# Altium PCB OTA1.PcbDoc
Units mil, origin at the board's own origin, x right, y up, seen from the top; angles counter-clockwise.
Board outline 2250 x 975 mil, 2 copper layers (Top Layer, Bottom Layer); 21 components, 22 nets, 123 pads, 29 vias.
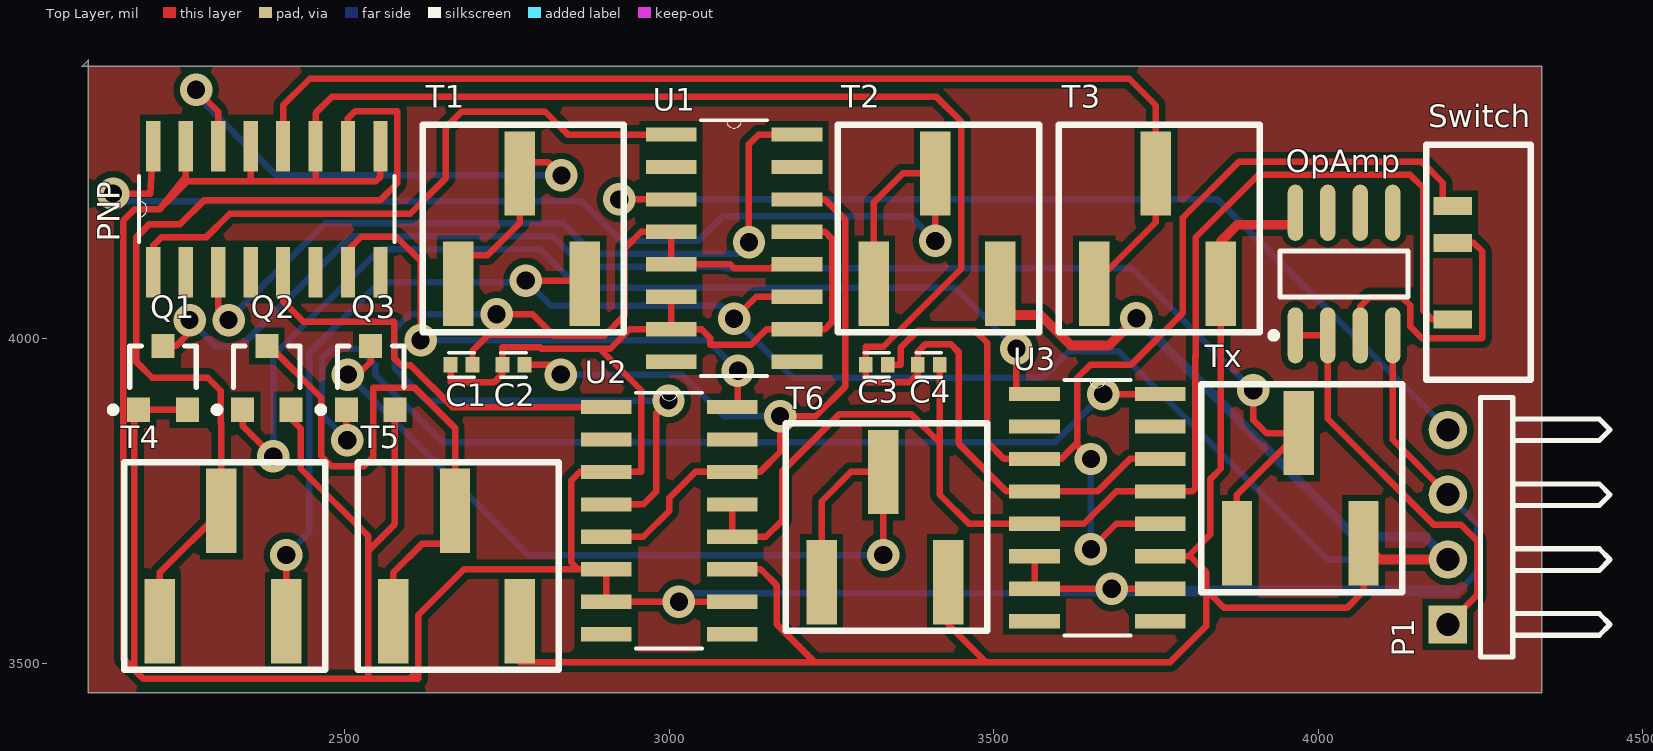
[diagram p0: Top Layer view]
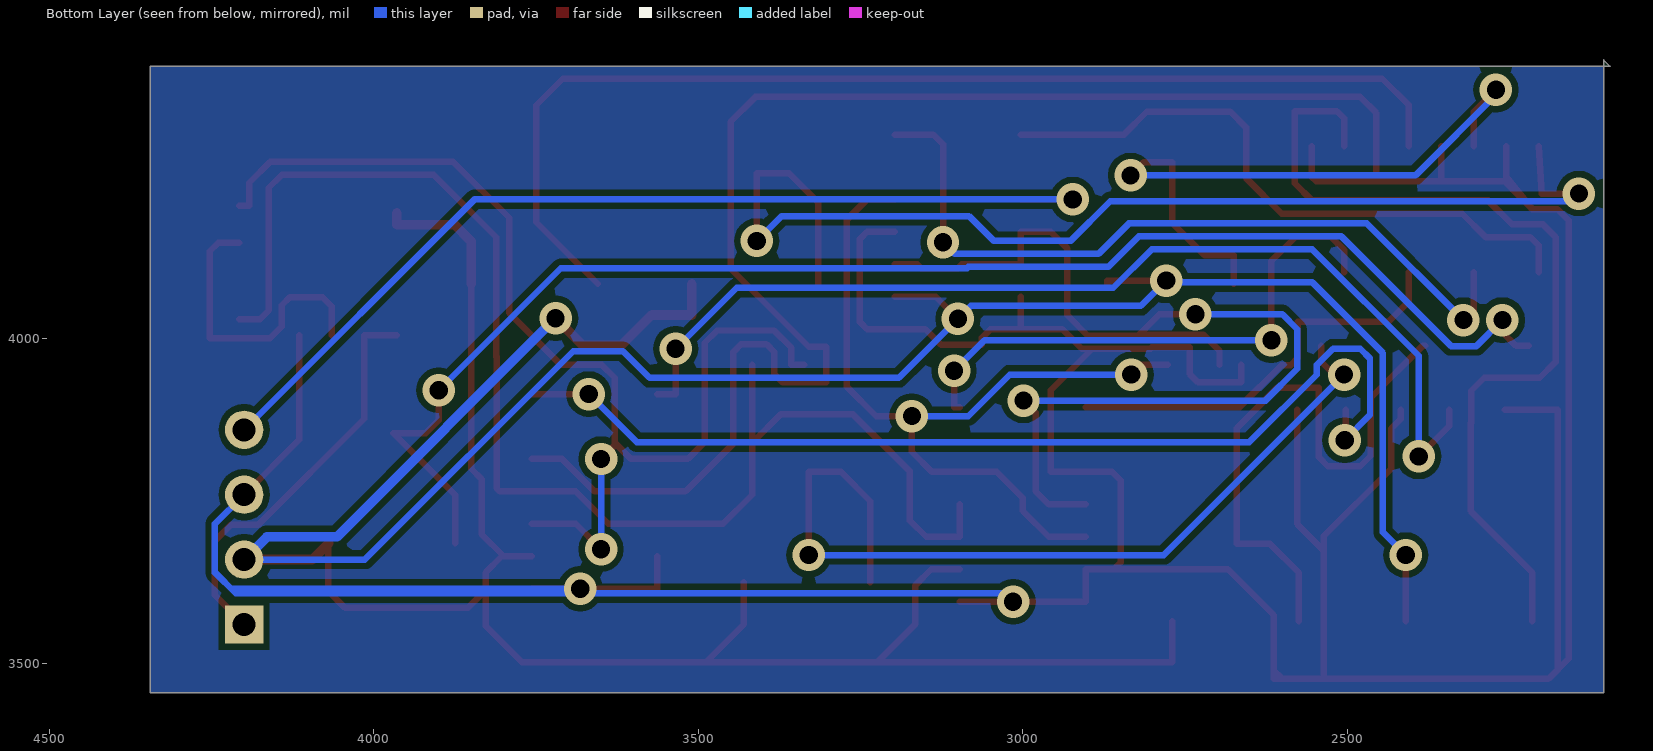
[diagram p1: Bottom Layer view, seen from below]

## Layer stack, top to bottom
Top Layer: signal copper 1.4
Dielectric: dielectric 12.6, FR-4, Dk 4.8
Bottom Layer: signal copper 1.4

## Board outline
2095,4420 4345,4420 4345,3455 2105,3455 2105,4430

## Design rules (kind name [scope] priority, off if disabled: settings)
Clearance [All] p1: gap=10
ComponentClearance [All] p1: gap=10 collisioncheckmode=3 verticalgap=10
PolygonConnect [All] p1: connectstyle=Relief reliefconductorwidth=10 reliefentries=4 polygonreliefangle="90 Angle"
RoutingVias [All] p1: holewidth=28 width=50 viastyle="Through Hole" minholewidth=28 minwidth=50 maxholewidth=28 maxwidth=50
SolderMaskExpansion [All] p1: expansion=4
TestPointUsage [All] p1: valid=0 allowmultiple=FALSE
Testpoint [All] p1: side=15 testpointundercomponent=TRUE minsize=40 maxsize=100 preferedsize=60 minholesize=0 maxholesize=40 preferedholesize=32 testpointgrid=1 style=1023 order=0-112345678
Width [All] p1: maxlimit=15 minlimit=10 preferedwidth=10 minimp=50.000000 maximp=50.000000 favimp=50.000000
18 further rules are at their usual default settings.

## Components (designator, comment, footprint, x,y, rotation, side; value= is the part's Value field where it differs from the comment)
C1 "10p" _C*CAPC1005X55N_CC0402C100K5GACAUTO_CPrimary_C 2680,3960 r0 top
C2 "10p" _C*CAPC1005X55N_CC0402C100K5GACAUTO_CPrimary_C 2760,3960 r0 top
C3 "10p" _C*CAPC1005X55N_CC0402C100K5GACAUTO_CPrimary_C 3320,3960 r0 top
C4 "10p" _C*CAPC1005X55N_CC0402C100K5GACAUTO_CPrimary_C 3400,3960 r0 top
OpAmp "LF153D" SO8_N 4040,4100 r90 top
P1 "Header 4H" HDR1X4H 4200,3560 r90 top
PNP "MMPQ3906" LM13700LM13700MLM13700LM13700MLM13700PrimaryLM13700 2380,4200 r90 top
Q1 "PNP" SOT-23B 2220,3940 r0 top
Q2 "PNP" SOT-23B 2380,3940 r0 top
Q3 "PNP" SOT-23B 2540,3940 r0 top
Switch "" PCBComponent_1#1 14380,19360 r90 top
T1 "1M" PCBComponent_1#2 17140,32160 r0 top
T2 "1M" PCBComponent_1#2 17780,32160 r0 top
T3 "1M" PCBComponent_1#2 18120,32160 r0 top
T4 "1M" PCBComponent_1#2 16680,31640 r0 top
T5 "1M" PCBComponent_1#2 17040,31640 r0 top
T6 "1M" PCBComponent_1#2 17700,31700 r0 top
Tx "1M" PCBComponent_1#2 18340,31760 r0 top
U1 "LM13700M" LM13700LM13700MLM13700LM13700MLM13700PrimaryLM13700 3100,4140 r0 top
U2 "LM13700M" LM13700LM13700MLM13700LM13700MLM13700PrimaryLM13700 3000,3720 r0 top
U3 "LM13700M" LM13700LM13700MLM13700LM13700MLM13700PrimaryLM13700 3660,3740 r0 top

## Footprints (in the part's own frame and the unit in brackets; to place one, negate y for a bottom-side part, rotate by r counter-clockwise, add the part's x,y. Pads: shape width x height; smd on the part's side, far side on the other; paste and mask are expansions set on the pad)
_C*CAPC1005X55N_CC0402C100K5GACAUTO_CPrimary_C [mm]
  rect 0.54x0.6 smd: 1(-0.43,0) 2(0.43,0)
  silkscreen extent -0.5,-0.48 0.5,0.48
HDR1X4H [mm] "Connector; Header; 4 Position; Right Angle"
  rect 1.5x1.5 hole 0.9: 1(0,0)
  round 1.5 hole 0.9: 2(2.54,0) 3(5.08,0) 4(7.62,0)
  silkscreen extent -1.27,-6.35 8.89,-1.27
LM13700LM13700MLM13700LM13700MLM13700PrimaryLM13700 [mil]
  rect 78x22 smd: 1(-97,175) 2(-97,125) 3(-97,75) 4(-97,25) 5(-97,-25) 6(-97,-75) 7(-97,-125) 8(-97,-175) 9(97,-175) 10(97,-125) 11(97,-75) 12(97,-25) 13(97,25) 14(97,75) 15(97,125) 16(97,175)
  silkscreen extent -51,-197 51,197
PCBComponent_1#1 [mm]
  rect 0.7x1.5 smd: 1(-389.382,258.381) 2(-386.385,258.381) 3(-384.937,258.381)
  round 0.9 on Top Solder: 8(-388.62,256.667) 9(-385.623,256.667)
  rect 1x0.8 on Top Paste: MP1(-390.728,257.581) MP2(-390.728,256.108) MP3(-383.515,257.581) MP4(-383.515,256.108)
  silkscreen extent -391.74,255.32 -382.55,259.41
PCBComponent_1#2 [mm]
  rect 1.19x3.3 smd: 1(-364.998,-708.787) 2(-367.411,-713.105) 3(-362.458,-713.105)
  silkscreen extent -368.81,-715.01 -360.93,-706.88
SO8_N [mm] "SOIC, 8-Leads, Body 4.9x3.9mm, Pitch 1.27mm, IPC Medium Density"
  oval 2.2x0.6 smd: 1(-2.4,1.905) 2(-2.4,0.635) 3(-2.4,-0.635) 4(-2.4,-1.905) 5(2.4,-1.905) 6(2.4,-0.635) 7(2.4,0.635) 8(2.4,1.905)
  silkscreen extent -2.52,-2.5 0.9,2.88, body extent -1.95,-2.45 1.95,2.45, height 1.75
SOT-23B [mm] "SOT-23; 3 Leads; Body 3.0 x 2.6 mm, inc. leads (LxW max)"
  rect 0.9x0.95 smd: 1(-0.95,-1.25) 2(0.95,-1.25) 3(0,1.25)
  silkscreen extent -2.07,-1.37 1.3,1.25

## Part data
C1 C2 C3 C4: library part C0402C100K5GACAUTO, "CAPACITOR CERAMIC 10 PF 10% TOL 50V C0G 0402"
OpAmp: "Wide-Bandwidth Dual J-FET Operational Amplifier"
P1: "Header, 4-Pin, Right Angle"
PNP: library part LM13700M, "Dual Operational Transconductance Amplifier with Linearizing Diodes and Buffers 16-SOIC 0 to 70"
Q1 Q2 Q3: "PNP Bipolar Transistor"
Switch T1 T2 T3 T4 T5 T6 Tx: library part Component_1
U1 U2 U3: "Dual Operational Transconductance Amplifier with Linearizing Diodes and Buffers 16-SOIC 0 to 70"

## Via types
v1: diameter 50, hole 28, Top Layer to Bottom Layer, 29 vias

## Nets (pads, with @x,y where several pads share a name; then routed paths per layer and width w, separated by ;. In a path a pad name is that pad's centre, name@x,y a point inside that pad or via, vN(x,y) a via of type N, cw(c..) or ccw(c..) an arc to the next point about the centre after c; other vN are vias at no path point)
BP: C4.2 Switch.1 U2.12 U2.13 U3.5 U3.13 | length 2172
  Top Layer w10: U2.13 U2.12 3149,3695 3174,3720 3174,3795.8 3262.39,3884.2 3372.73,3884.2 3416.93,3840 ; C4.2 3416.93,3840 ; Switch.1 4176,4030 4162,4044 4162,4232.8 4142,4252.8 3907.83,4252.8 3811.57,4156.54 3811.57,3972.83 3811,3972.25 3811,3770 3806,3765 U3.13 3689,3765 3639,3715 U3.5 3461.93,3715 3416.93,3760 3416.93,3840
GND: C1.1 C2.1 C3.1 C4.1 OpAmp.4 P1.3 PNP.9 PNP.11 PNP.13 PNP.15 Q1.1 Q1.2 Q2.2 Q3.2 U1.6 U1.7 U1.10 U1.13 U2.3 U2.6 U2.7 U2.10 U3.4 U3.6 U3.7 U3.10 U3.14 | length 9802.7
  Top Layer w10: 2176,3490 2176,3890.79 Q1.2 ; PNP.15 2255,4250 2215,4200 ; 2355,4243 PNP.13 ; Q2.2 2417.4,3876.96 2432.45,3861.92 2432.45,3800 2536.57,3695.87 2536.57,3476 ; 2455,4243 2455,4348 2480,4373 3412,4373 3450,4335 3450,4108 3330,3988 3303.07,3988 3303.07,3933 3370,3933 3383.07,3946.07 3383.07,3980 3395.14,3992.07 3433.93,3992.07 3446,3980 3446,3839 3520,3765 3660,3765 3710,3815 U3.14 ; 2536.57,3674 2577.4,3714.83 Q3.2 ; PNP.9 2555,4250 2548,4243 2258,4243 2215,4200 ; 2600,3476 2613.43,3489.43 ; C1.1 2663.07,3933 2730,3933 2743.07,3946.07 2743.07,3986.81 2801.19,3986.81 2803,3985 2909,3985 2939,4015 3050,4015 3063,4002 3063,3991 3126,3991 3150,4015 3240,4015 3251,4026 3251,4154 3240,4165 U1.13 ; 2860,3645 2849,3656 2849,3782 2862,3795 2957,3795 2957,3921 2893,3985 ; U1.7 U1.6 ; v1(3015,3595) U2.7 U2.6 2684,3645 2613.43,3574.43 2613.43,3476 2190,3476 2159,3507 2159,4182.86 2176.14,4200 2215,4200 ; v1@3028,3608 3028,3595 U2.10 ; U3.6 U3.7 U3.10 ; OpAmp.4 4115,3845 P1.3
  Bottom Layer w10: v1(3015,3595) 3028,3608 4213,3608 4245,3640 4245,3715 P1.3 ; v1(3682,3615) 4220,3615
LP: C3.2 Switch.3 U3.3 U3.12 | length 1757.6
  Top Layer w10: C3.2 3357,3960 3357,3986.71 3383.29,4013 3471,4013 3490,3994 3490,3841 3516,3815 U3.3 3604,3815 3627,3838 ; v1(3650,3676) 3689,3715 U3.12 ; v1(3650,3815) 3627,3838 ; Switch.3 4192,4205 4192,4240.8 4160,4272.8 3877.8,4272.8 3791.57,4186.57 3791.57,4040 3711.57,3960 3649,3960 3629,3940 3629,3840 3627,3838
  Bottom Layer w10: v1(3650,3676) v1(3650,3815)
NetC1_2: C1.2 U1.4 U1.5 U1.12 U2.4 | length 1717.3
  Top Layer w10: C1.2 2696.93,3981.93 2721.81,4006.81 2820.75,4006.81 ; v1(2734,4038) 2789.56,4038 2820.75,4006.81 ; U2.4 2960,3745 2980,3765 2980,3886 v1(2999,3905) ; U1.12 3163,4115 3157,4109 3100,4109 3094,4115 U1.5 U1.4 2957,4165 2931.3,4139.3 2931.3,4036.3 2900,4005 2822.56,4005 2820.75,4006.81
  Bottom Layer w10: v1(2734,4038) 2600,4038 2577,4015 2577,3954 2626,3905 v1(2999,3905)
NetC2_2: C2.2 U1.14 U2.5 U2.14 | length 1279.3
  Top Layer w10: C2.2 2818,3960 v1(2833,3945) ; U2.5 2960,3695 3000,3735 3000,3755 3040,3795 U2.14 3140,3795 3171,3826 v1(3171,3881) 3226,3881 3271,3926 3271,4184 3240,4215 U1.14
  Bottom Layer w10: v1(2833,3945) 3020.28,3945 3084.28,3881 v1(3171,3881)
NetOpAmp_3: OpAmp.3 Switch.2 | length 468.6
  Top Layer w10: OpAmp.3 4065,4050 4079,4064 4130,4064 4142,4052 4142,4019 4160,4001 4253,4001 4253,4135 4240,4148 Switch.2
NetPNP_1: PNP.1 U1.1 | length 984.5
  Top Layer w10: PNP.1 2205,4144 2218,4157 2287,4157 2323,4193 2601,4193 2656,4248 2656,4326 2680,4350 2809,4350 2844,4315 U1.1
NetPNP_3: PNP.3 U1.16 | length 1202.5
  Top Layer w10: PNP.3 2305,4045 v1(2321,4029) ; v1(3123,4149) 3123,4300 3138,4315 U1.16
  Bottom Layer w10: v1(2321,4029) 2470,4178 2836.48,4178 2883.48,4131 3105,4131 v1(3123,4149)
NetPNP_5: PNP.5 U2.1 | length 643.6
  Top Layer w10: PNP.5 2405,4057.91 2436.57,4026.34 2576.57,4026.34 2576.57,3970 2587.01,3959.57 2601.43,3959.57 2666,3895 U2.1
NetPNP_7: PNP.7 U2.16 | length 865.4
  Top Layer w10: PNP.7 2505,4137 2525.4,4157.4 2579.6,4157.4 2617,4120 v1(2617,3998) ; U2.16 3106,3895 v1(3106,3951)
  Bottom Layer w10: v1(2617,3998) 3059,3998 v1(3106,3951)
NetPNP_10: PNP.10 T4.1 T4.2 | length 1406.8
  Top Layer w10: T4.2 2215,3640 T4.1 2310,3870 2309,3871 2309,3920 2289,3940 2203.28,3940 2179,3964.28 2179,4157 2199,4177 2246.65,4177 2283.01,4213.36 2554.36,4213.36 2581,4240 2581,4351 2516,4351 2505,4340 PNP.10
NetPNP_12: PNP.12 T3.1 T3.2 | length 1756.3
  Top Layer w10: PNP.12 2405,4360 2446,4401 3709,4401 3750,4360 T3.1 3750,4180 T3.2
NetPNP_14: PNP.14 T1.1 T1.2 | length 1051.8
  Top Layer w10: v1(2271,4384) 2305,4350 PNP.14 ; T1.2 2675,4129 2720,4129 2770,4179 T1.1 2770,4272 2814,4272 v1(2834,4252)
  Bottom Layer w10: v1(2271,4384) 2267,4380 2395,4252 v1(2834,4252)
NetPNP_16: PNP.16 T2.1 T2.2 | length 1801.9
  Top Layer w10: v1(2143,4224) 2200,4224 PNP.16 ; T2.2 3315,4210 3360,4255 T2.1 v1(3410,4151)
  Bottom Layer w10: v1(2143,4224) 2155,4212 2865.48,4212 2926.48,4151 3044.58,4151 3083,4189.42 3371.58,4189.42 v1(3410,4151)
NetQ1_3: Q1.3 Tx.1 Tx.2 | length 2225.9
  Top Layer w10: Q1.3 2240,3989.21 2261,4010.21 v1(2261,4029) ; Tx.2 3875,3760 Tx.1 3920,3855 3900,3875 v1(3900,3921)
  Bottom Layer w10: v1(2261,4029) 2301,3989 2340,3989 2509,4158 2821.48,4158 2868.48,4111 3084,4111 3086,4109 3712,4109 v1(3900,3921)
NetQ2_1: Q2.1 U3.1 | length 1620.7
  Top Layer w10: Q2.1 2342.6,3866.4 v1(2390,3819) ; v1(3535,3985) 3535,3915 U3.1
  Bottom Layer w10: v1(2390,3819) 2390,3974 2554,4138 2801.48,4138 2860.48,4079 3441,4079 v1(3535,3985)
NetQ2_3: Q2.3 T5.1 T5.2 | length 924.5
  Top Layer w10: Q2.3 2384,3989.21 2464,3909.21 2464,3820 2480,3804 2530,3804 2544,3818 2544,3925 2607.71,3925 2670,3862.71 T5.1 2670,3684 2619,3684 2575,3640 T5.2
NetQ3_1: Q3.1 U3.16 | length 1586.8
  Top Layer w10: Q3.1 2502.6,3845.4 v1(2504,3844) ; v1(3669,3915) U3.16
  Bottom Layer w10: v1(2504,3844) 2465,3883 2465,3970 2480,3985 2522,3985 2547,3960 2547,3945 2651,3841 3595,3841 v1(3669,3915)
NetQ3_3: Q3.3 T6.1 T6.2 | length 1374.3
  Top Layer w10: v1(2505,3945) 2520,3945 2540,3965 Q3.3 ; T6.2 3235,3750 3280,3795 T6.1 v1(3330,3667)
  Bottom Layer w10: v1(2505,3945) 2783,3667 v1(3330,3667)
VCC: OpAmp.8 P1.2 T1.3 T2.3 T3.3 T4.3 T5.3 T6.3 Tx.3 U1.11 U2.11 U3.11 | length 6383.2
  Top Layer w10: T4.3 v1(2410,3667) ; T5.3 2770,3502 3224,3502 ; v1@2779,4087 v1(2779,4090) 2870,4090 T1.3 ; U2.11 3141,3645 3166,3620 3166,3560 3224,3502 ; v1(3100,4031) 3134,4065 U1.11 ; T6.3 3430,3560 3488,3502 ; U3.11 3803,3665 ; T3.3 3850,3800 3834.06,3784.06 3834.06,3699.06 3801.5,3666.5 3803,3665 ; Tx.3 4070,3611 4044.5,3585.5 3855.5,3585.5 3828,3613 ; 3224,3502 3488,3502 ; 3488,3502 3772,3502 3828,3558 3828,3613 ; 3803,3665 3828,3640 3828,3613
  Top Layer w15: T2.3 3510,4037 3572.04,4037 3619.04,3990 3678,3990 v1(3720,4032) ; T3.3 3850,4150 3876,4176 3965,4176 OpAmp.8 ; Tx.3 4095,3660 P1.2
  Bottom Layer w10: v1(2410,3667) 2445,3702 2445,3978.29 2553.71,4087 v1@2779,4087 ; v1(2779,4090) 2818,4051 3080,4051 v1(3100,4031) 3191,3940 3575.23,3940 3616.23,3981 3693,3981 4014,3660 P1.2
  Bottom Layer w15: v1(3720,4032) 4057,3695 4165,3695 P1.2
VIN: P1.4 U1.3 | length 1504
  Top Layer w10: v1(2923,4215) U1.3
  Bottom Layer w10: v1(2923,4215) 3845,4215 P1.4
VOUT: OpAmp.1 OpAmp.2 P1.1 | length 634
  Top Layer w10: OpAmp.1 OpAmp.2 4015,3877 4178,3714 4220,3714 4245,3689 4245,3605 P1.1
pads on no net: OpAmp.5 OpAmp.6 OpAmp.7 PNP.2 PNP.4 PNP.6 PNP.8 Switch.8 Switch.9 Switch.MP1 Switch.MP2 Switch.MP3 Switch.MP4 U1.2 U1.8 U1.9 U1.15 U2.2 U2.8 U2.9 U2.15 U3.2 U3.8 U3.9 U3.15

## Polygon pours and split planes (outlines as drawn)
no net on Top Layer "gnd" (solid, pour order 1000): 2105,4420 4345,4420 4345,3455 2105,3455
no net on Bottom Layer "gnd" (solid, pour order 1001): 2105,4420 4345,4420 4345,3455 2105,3455